# EAGLE board shield (EAGLE 9.6.2)
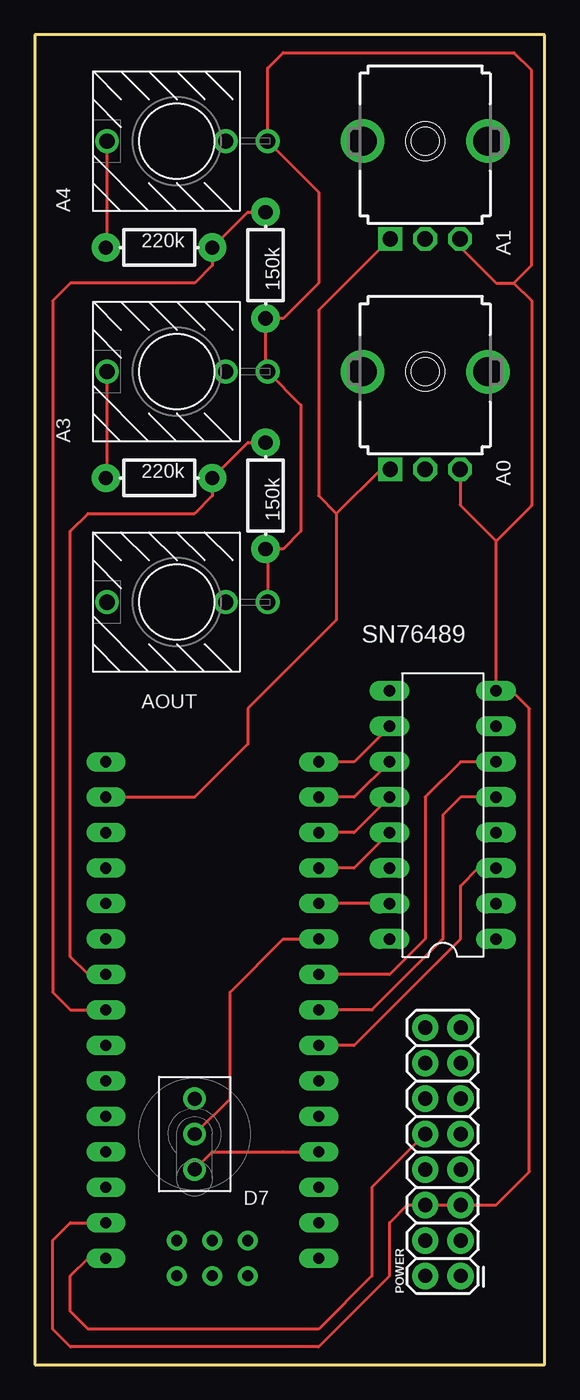
[diagram p0: board, top side]
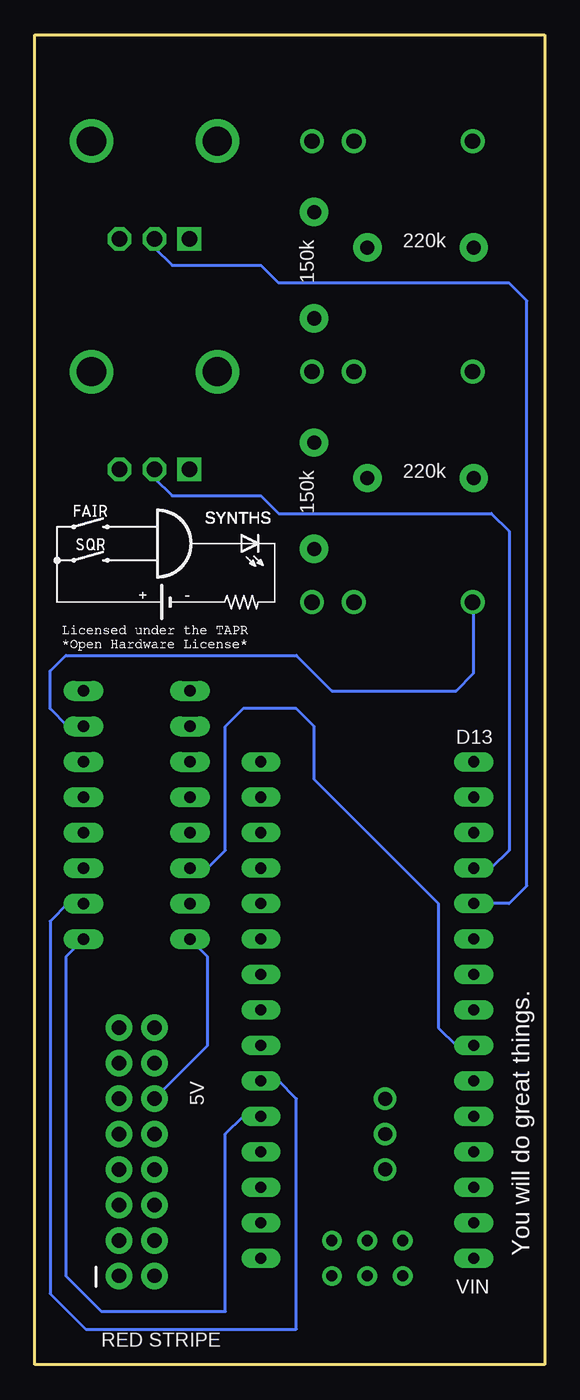
[diagram p1: board, bottom side, seen from below]

Size 36.5 x 95.24 mm. Coordinates in mm from the lower left corner, seen from the top.
Outline: 0,0 36.5,0 36.5,95.24 0,95.24 0,0
Copper layers (1*16): Top 0.035mm / dielectric 1.5mm / Bottom 0.035mm
Design rules "SparkFun *": minimum track width 8mil, minimum drill 20mil, track to track 8mil, track to pad 8mil, pad to pad 8mil, via to via 8mil, smd to smd 8mil, copper to edge 8mil, drill to drill 8mil, minimum pad ring 12mil, minimum via ring 10mil, stop-mask expansion 4mil, vias tented up to drill 20mil, thermal gap 10mil

## Footprints (pad centres in the part's own frame; a part is rotated, then mirrored left to right if it is on the bottom)
9MM_SNAP-IN_POT = drill 1.1 square: 1 -2.5,-7 | drill 1.1 octagon: 2 0,-7; 3 2.5,-7 | drill 2.1 pad 2.794: CHASSIS1 -4.5,0; CHASSIS2 4.5,0
WQP-PJ366ST_JACK = drill 1.1: P$1_TIP 0,5; P$2_SWITCH 0,-3.5; P$3_SLEEVE 0,-6.5
SUBMINI_TOGGLE = drill 1 pad 1.422: 1 -2.54,0; 3 2.54,0; COM 0,0
2X8 = drill 1.016 pad 1.88: 1 0,0; 2 0,2.54; 3 2.54,0; 4 2.54,2.54; 5 5.08,0; 6 5.08,2.54; 7 7.62,0; 8 7.62,2.54; 9 10.16,0; 10 10.16,2.54; 11 12.7,0; 12 12.7,2.54; 13 15.24,0; 14 15.24,2.54; 15 17.78,0; 16 17.78,2.54
AXIAL-0.3-KIT = drill 1.016 pad 2.032: P$1 -3.81,0; P$2 3.81,0
DIL16 = drill 0.813 long: 1 -8.89,-3.81; 2 -6.35,-3.81; 3 -3.81,-3.81; 4 -1.27,-3.81; 5 1.27,-3.81; 6 3.81,-3.81; 7 6.35,-3.81; 8 8.89,-3.81; 9 8.89,3.81; 10 6.35,3.81; 11 3.81,3.81; 12 1.27,3.81; 13 -1.27,3.81; 14 -3.81,3.81; 15 -6.35,3.81; 16 -8.89,3.81
NANO = drill 0.8 long: 3.3V -10.16,24.13; 5V -10.16,-1.27; A0 -10.16,19.05; A1 -10.16,16.51; A2 -10.16,13.97; A3 -10.16,11.43; A4 -10.16,8.89; A5 -10.16,6.35; A6 -10.16,3.81; A7 -10.16,1.27; AREF -10.16,21.59; D2 5.08,1.27; D3 5.08,3.81; D4 5.08,6.35; D5 5.08,8.89; D6 5.08,11.43; D7 5.08,13.97; D8 5.08,16.51; D9 5.08,19.05; D10 5.08,21.59; D11 5.08,24.13; D12 5.08,26.67; D13 -10.16,26.67; GND -10.16,-6.35; GND1 5.08,-1.27; RAW -10.16,-8.89; RST -10.16,-3.81; RST1 5.08,-3.81; RX1 5.08,-6.35; TX0 5.08,-8.89 | drill 0.8: ICSP1 -5.08,-10.16; ICSP2 -5.08,-7.62; ICSP3 -2.54,-10.16; ICSP4 -2.54,-7.62; ICSP5 0,-10.16; ICSP6 0,-7.62

## Placement (x,y rotation side)
A0  [9MM_SNAP-IN_POT]  27.94,71.12 0 top
A1  [9MM_SNAP-IN_POT]  27.94,87.63 0 top
A3  THONKI-STEREO  [WQP-PJ366ST_JACK]  10.16,71.12 90 top
A4  THONKI-STEREO  [WQP-PJ366ST_JACK]  10.16,87.63 90 top
AOUT  THONKI-STEREO  [WQP-PJ366ST_JACK]  10.16,54.61 90 top
D7  SUBMINI_SPDT  [SUBMINI_TOGGLE]  11.43,16.51 90 top
POWER  [2X8]  30.48,6.35 90 top
R7  220k  [AXIAL-0.3-KIT]  8.89,80.01 180 top
R8  150k  [AXIAL-0.3-KIT]  16.51,78.74 90 top
R9  220k  [AXIAL-0.3-KIT]  8.89,63.5 180 top
R10  150k  [AXIAL-0.3-KIT]  16.51,62.23 90 top
SN76489  [DIL16]  29.21,39.37 90 top
U$1  NANO  [NANO]  15.24,16.51 0 top

## Library data of the parts
A0 A1 A3 A4 AOUT D7 = MusicThingModular
POWER = SparkFun-Connectors
R7-R10 = SparkFun-Resistors; PROD_ID: RES-12184
SN76489 = ic-package
U$1 = Arduino-clone

## Nets
N$1: SN76489.14 U$1.A5
N$2: POWER.12 SN76489.16
N$3: A0.1 A1.1 U$1.3.3V
N$4: SN76489.5 U$1.D5
N$5: SN76489.6 U$1.D6
N$6: SN76489.3 U$1.D4
N$7: SN76489.1 U$1.D2
N$8: SN76489.2 U$1.D3
N$9: POWER.10 U$1.RAW
N$10: A3.P$1_TIP R9.P$2
N$13: AOUT.P$1_TIP SN76489.7
N$14: SN76489.10 U$1.D12
N$15: D7.1 U$1.GND1
N$16: A0.2 U$1.A0
N$17: A1.2 U$1.A1
N$19: R9.P$1 R10.P$2 U$1.A3
N$20: A4.P$1_TIP R7.P$2
N$21: R7.P$1 R8.P$2 U$1.A4
N$23: D7.COM U$1.D7
N$24: A0.3 A1.3 A3.P$3_SLEEVE A4.P$3_SLEEVE AOUT.P$3_SLEEVE POWER.5 POWER.6 R8.P$1 R10.P$1 SN76489.8 U$1.GND
N$25: SN76489.11 U$1.D11
N$26: SN76489.13 U$1.D9
N$27: SN76489.15 U$1.D8
N$28: SN76489.12 U$1.D10

## Tracks (layer width: path | path; a pad name or v marks a point on that pad's centre or on a via)
N$1
  Bottom 0.203: SN76489.14 24.13,35.56 22.86,36.83 22.86,45.72 21.59,46.99 17.78,46.99 16.51,45.72 16.51,41.91 7.62,33.02 7.62,24.13 6.35,22.86 U$1.A5
N$2
  Bottom 0.203: POWER.12 24.13,22.86 24.13,29.21 SN76489.16
N$3
  Top 0.203: A1.1 20.32,75.51 20.32,62.23 21.59,60.96 | 21.59,60.96 21.59,53.34 15.24,46.99 15.24,44.45 11.43,40.64 U$1.3.3V | A0.1 24.75,64.12 21.59,60.96
N$4
  Top 0.203: SN76489.5 30.48,40.64 29.21,39.37 29.21,30.48 24.13,25.4 U$1.D5
N$5
  Top 0.203: SN76489.6 30.48,43.18 27.94,40.64 27.94,30.48 25.4,27.94 U$1.D6
N$6
  Top 0.203: U$1.D4 22.86,22.86 30.48,30.48 30.48,34.29 31.75,35.56 SN76489.3
N$7
  Bottom 0.203: SN76489.1 34.29,29.21 34.29,6.35 31.75,3.81 22.86,3.81 22.86,16.51 21.59,17.78 U$1.D2
N$8
  Bottom 0.203: SN76489.2 34.14,33.02 35.41,31.75 35.41,5.08 32.87,2.54 17.78,2.54 17.78,19.05 19.05,20.32 U$1.D3
N$9
  Top 0.203: POWER.10 24.13,12.7 24.13,6.35 20.32,2.54 3.81,2.54 2.54,3.81 2.54,6.35 3.81,7.62 U$1.RAW
N$10
  Top 0.203: A3.P$1_TIP 5.16,63.58 R9.P$2
N$13
  Bottom 0.203: AOUT.P$1_TIP 5.08,54.53 5.08,49.53 6.35,48.26 15.24,48.26 17.78,50.8 34.29,50.8 35.41,49.68 35.41,46.99 34.14,45.72 SN76489.7
N$14
  Top 0.203: SN76489.10 22.86,43.18 U$1.D12
N$15
  Top 0.203: U$1.GND1 17.78,15.24 12.7,15.24 D7.1
N$16
  Bottom 0.203: U$1.A0 3.81,35.56 2.54,36.83 2.54,59.69 3.81,60.96 19.05,60.96 20.32,62.23 26.67,62.23 27.94,63.5 A0.2
N$17
  Bottom 0.203: U$1.A1 2.54,33.02 1.27,34.29 1.27,76.2 2.54,77.47 19.05,77.47 20.32,78.74 26.67,78.74 27.94,80.01 A1.2
N$19
  Top 0.203: U$1.A3 3.81,27.94 2.54,29.21 2.54,59.69 3.81,60.96 11.43,60.96 12.7,62.23 R9.P$1 15.24,66.04 R10.P$2
N$20
  Top 0.203: A4.P$1_TIP 5.16,80.09 R7.P$2
N$21
  Top 0.203: U$1.A4 2.54,25.4 1.27,26.67 1.27,76.2 2.54,77.47 11.43,77.47 12.7,78.74 R7.P$1 15.24,82.55 R8.P$2
N$23
  Top 0.203: U$1.D7 17.78,30.48 13.97,26.67 13.97,19.05 D7.COM
N$24
  Top 0.203: U$1.GND 2.54,10.16 1.27,8.89 1.27,2.54 2.54,1.27 20.32,1.27 25.4,6.35 25.4,10.16 26.67,11.43 POWER.6 POWER.5 33.02,11.43 35.41,13.82 35.41,46.99 34.14,48.26 SN76489.8 33.02,59 | 33.02,59 30.44,61.58 A0.3 | 33.02,59 35.56,61.54 35.56,76.2 34.29,77.47 | AOUT.P$3_SLEEVE 16.66,58.27 R10.P$1 17.78,58.42 19.05,59.69 19.05,68.73 A3.P$3_SLEEVE 16.51,71.27 R8.P$1 17.78,74.93 20.32,77.47 20.32,83.97 A4.P$3_SLEEVE 16.66,92.86 17.78,93.98 34.29,93.98 35.56,92.71 35.56,78.74 34.29,77.47 | A1.3 30.44,80.05 33.02,77.47 34.29,77.47
N$25
  Top 0.203: SN76489.11 22.86,40.64 U$1.D11
N$26
  Top 0.203: U$1.D9 22.86,35.56 SN76489.13
N$27
  Top 0.203: SN76489.15 U$1.D8
N$28
  Top 0.203: SN76489.12 22.86,38.1 U$1.D10

## Text on the board
tNames: A4 | 220k | 150k | A3 | 220k | 150k | AOUT
bNames: 220k | 150k | 220k | 150k | D13 | 5V | You will do great things. | VIN | RED STRIPE